# Altium PCB PCB4.PcbDoc
Units mm, origin at the board's own origin, x right, y up, seen from the top; angles counter-clockwise.
Board outline 99.95 x 84.84 mm, 2 copper layers (Top Layer, Bottom Layer); 40 components, 28 nets, 106 pads, 24 vias.
Unrouted connection lines stored in the file: 10.
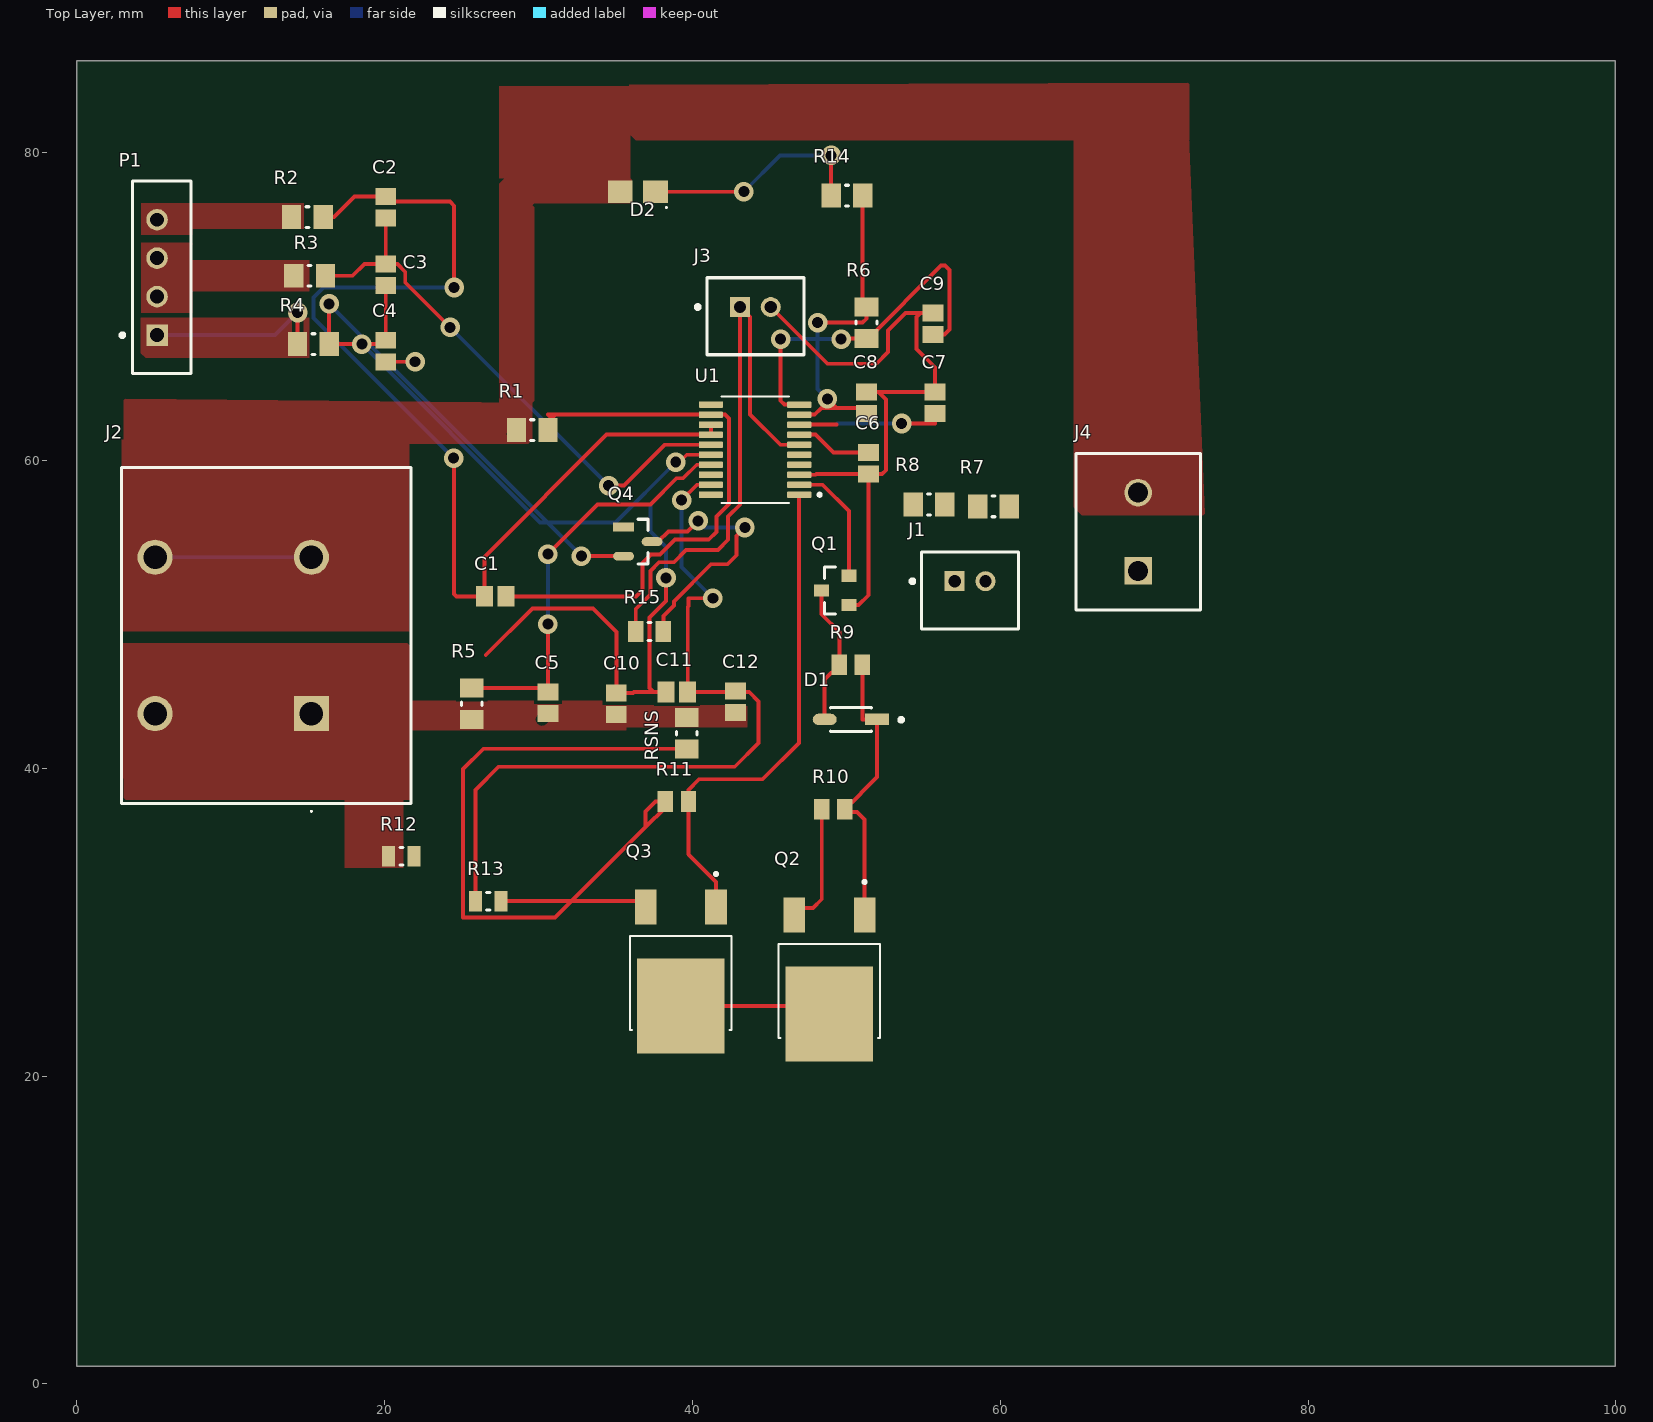
[diagram p0: Top Layer view]
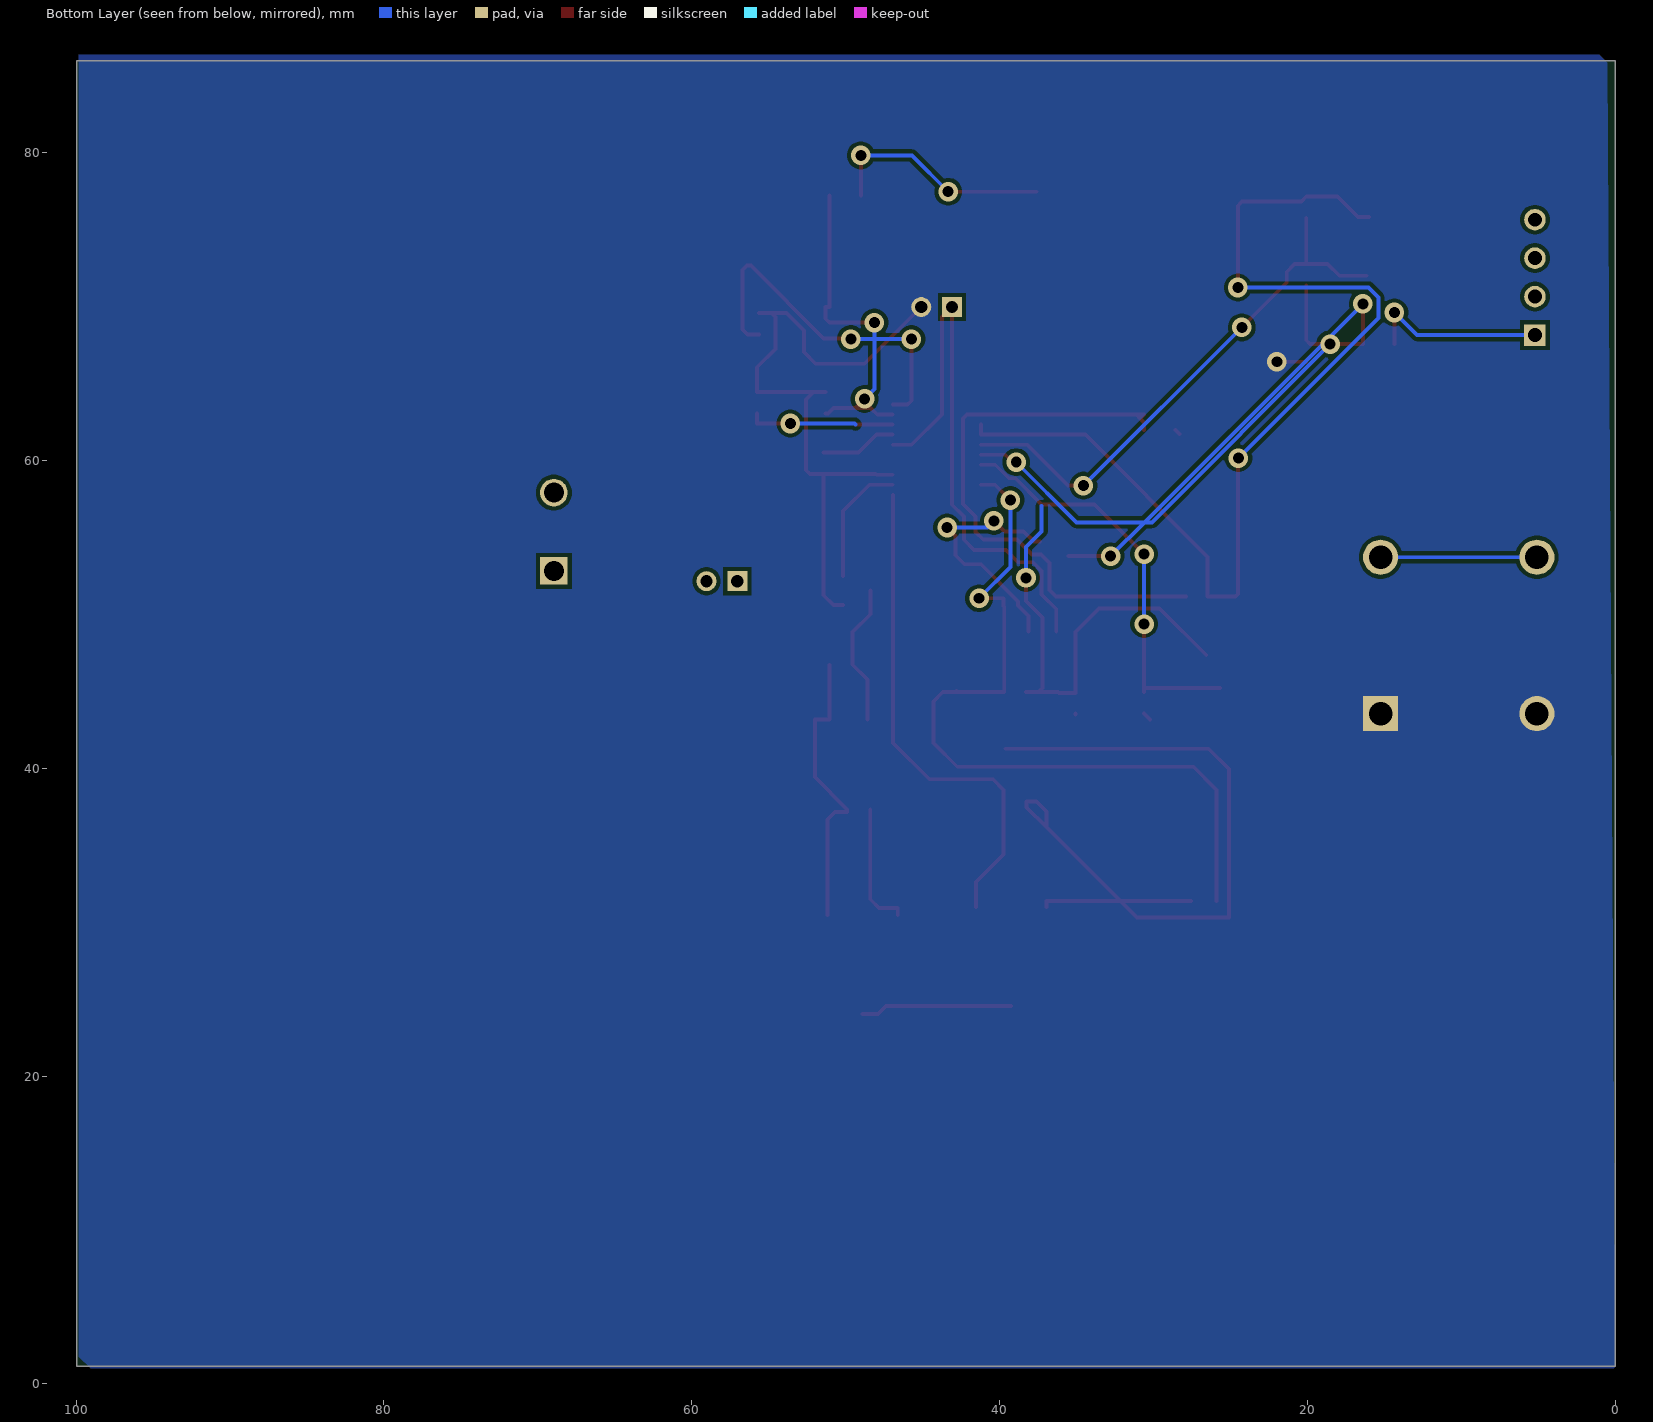
[diagram p1: Bottom Layer view, seen from below]

## Layer stack, top to bottom
Top Solder: solder mask 0.0102, Solder Resist, Dk 3.5
Top Layer: signal copper 0.0356
Dielectric 1: dielectric 0.32, FR-4, Dk 4.8
Bottom Layer: signal copper 0.0356
Bottom Solder: solder mask 0.0102, Solder Resist, Dk 3.5

## Board outline
0,1.143 99.949,1.143 99.949,85.979 0,85.979

## Design rules (kind name [scope] priority, off if disabled: settings)
Clearance [All] p1: gap=0.254 ignorepadtopadclearanceinfootprint=FALSE
PlaneConnect [All] p1: planeconnectstyle=Direct reliefexpansion=0.508 reliefentries=4 reliefconductorwidth=0.254 reliefairgap=0.254
PolygonConnect [All] p1: connectstyle=Direct reliefconductorwidth=0.2 reliefentries=4 polygonreliefangle="90 Angle" airgapwidth=0.2
RoutingVias [All] p1: holewidth=0.711 width=1.27 viastyle="Through Hole" minholewidth=0.711 minwidth=1.27 maxholewidth=0.711 maxwidth=1.27
SolderMaskExpansion [All] p1: expansion=0.102 istentingtop=FALSE
SupplyNets "Schematic Supply Nets" [InNet('GND')] p1: voltage=0.000
Width [All] p1: maxlimit=0.254 minlimit=0.254 preferedwidth=0.254
29 further rules are at their usual default settings.

## Components (designator, comment, footprint, x,y, rotation, side; value= is the part's Value field where it differs from the comment)
C1 "1uF" CAPC2013X140X50LL20T25 27.178,51.181 r0 top
C2 "1uF" CAPC2013X140X50LL20T25 20.066,76.454 r90 top
C3 "1uF" CAPC2013X140X50LL20T25 20.066,72.074 r90 top
C4 "1uF" CAPC2013X140X50LL20T25 20.066,67.118 r90 top
C5 "1uF" CAPC2013X140X50LL20T25 30.607,44.258 r270 top
C6 "1uF" CAPC2013X140X50LL20T25 51.435,59.817 r90 top
C7 "4.7uF" CAPC2013X140X50LL20T25 55.753,63.754 r270 top
C8 "1uF" CAPC2013X140X50LL20T25 51.308,63.754 r270 top
C9 "10uF" CAPC2013X140X50LL20T25 55.626,68.899 r270 top
C10 "0.1 uF" CAPC2013X140X50LL20T25 35.052,44.196 r270 top
C11 "0.1 uF" CAPC2013X140X50LL20T25 38.989,44.958 r180 top
C12 "0.1 uF" CAPC2013X140X50LL20T25 42.799,44.323 r90 top
D1 "1N5819HW" FP-SOD123-IPC_A 50.292,43.18 r180 top
D2 "SMF24A-HE3-08" DIOM2818X11N 36.449,77.47 r180 top
J1 "440054-2" FP-440054-2-MFG 58.039,51.562 r180 top
J2 "39970-0102" 399700102 15.24,43.561 r90 top
J3 "440054-2" FP-440054-2-MFG 44.085,69.377 r180 top
J4 "1729128" PHOE-1729128-2_V 68.961,55.372 r90 top
P1 "B4B-EH-A(LF)(SN)" JST-B4B-EH-A_V 5.207,71.902 r90 top
Q1 "IRLML6401TRPBF" FP-SOT23-MFG 49.276,51.562 r180 top
Q2 "TSM090N03CPROG" TRANS_TSM090N03CPROG 48.895,26.289 r270 top
Q3 "TSM090N03CPROG" TRANS_TSM090N03CPROG 39.242,26.798 r270 top
Q4 "2N7002NXAKR" FP-SOT23-IPC_B 36.449,54.737 r0 top
R1 "100" RESC2013X60X30ML20T20 29.591,61.976 r0 top
R2 "100" RESC2013X60X30ML20T20 14.977,75.819 r0 top
R3 "100" RESC2013X60X30ML20T20 15.122,72.009 r0 top
R4 "100" RESC2013X60X30ML20T20 15.367,67.564 r0 top
R5 "100" RESC2013X60X30ML20T20 25.654,44.196 r90 top
R6 "100" RESC2013X60X30ML20T20 51.308,68.961 r90 top
R7 "10K" RESC2013X60X30ML20T20 59.554,57.023 r180 top
R8 "10K" RESC2013X60X30ML20T20 55.372,57.15 r180 top
R9 "1M Ohm" RESC2013X60X40LL20T25 50.292,46.736 r180 top
R10 "ERA-6AEB105V" RESC2013X60X40LL20T25 49.149,37.338 r0 top
R11 "ERA-6AEB105V" RESC2013X60X40LL20T25 38.989,37.846 r0 top
R12 "100" RESC2013X50X30LL20T20 21.082,34.29 r0 top
R13 "100" RESC2013X50X30LL20T20 26.733,31.369 r180 top
R14 "100" RESC2013X60X30ML20T20 50.038,77.216 r180 top
R15 "10K" RESC2013X60X35NL10T20 37.211,48.895 r0 top
RSNS "5m Ohm 0805" RESC2013X60X30ML20T20 39.624,42.282 r90 top
U1 "" BQ7692006PW 44.069,60.706 r180 top

## Footprints (in the part's own frame and the unit in brackets; to place one, negate y for a bottom-side part, rotate by r counter-clockwise, add the part's x,y. Pads: shape width x height; smd on the part's side, far side on the other; paste and mask are expansions set on the pad)
399700102 [mm]
  rect 2.28x2.28 hole 1.52: 1(0,0)
  round 2.28 hole 1.52: 2(0,10.16) 3(10.16,0) 4(10.16,10.16)
  silkscreen extent -6.4,-6.47 16,12.33
BQ7692006PW [mm]
  rrect25% 1.57x0.41 smd: 1(-2.87,2.925) 2(-2.87,2.275) 3(-2.87,1.625) 4(-2.87,0.975) 5(-2.87,0.325) 6(-2.87,-0.325) 7(-2.87,-0.975) 8(-2.87,-1.625) 9(-2.87,-2.275) 10(-2.87,-2.925) 11(2.87,-2.925) 12(2.87,-2.275) 13(2.87,-1.625) 14(2.87,-0.975) 15(2.87,-0.325) 16(2.87,0.325) 17(2.87,0.975) 18(2.87,1.625) 19(2.87,2.275) 20(2.87,2.925)
  silkscreen extent -4.29,-3.45 2.2,3.45, body extent -3.2,-3.25 3.2,3.25, height 1.2
CAPC2013X140X50LL20T25 [mm] "Chip Capacitor, 2-Leads, Body 2.00x1.25mm, IPC High Density"
  rect 1.1x1.35 smd: 1(-0.7,0) 2(0.7,0)
  body extent -1.1,-0.72 1.1,0.72, height 1.4
DIOM2818X11N [mm] "Molded Diode, 2-Leads, Body 2.80x1.80mm, IPC Medium Density"
  rect 1.6x1.45 smd: 1(-1.15,0) 2(1.15,0)
  silkscreen extent -1.9,0.98 -1.8,1.07, body extent -1.67,-0.95 1.67,0.95, height 1.08
FP-440054-2-MFG [mm]
  rect 1.3x1.3 hole 0.8 paste-2539.97 mask+0: 1(1,-0.6)
  round 1.3 hole 0.8 paste-2539.97 mask+0: 2(-1,-0.6)
  silkscreen extent -3.15,-2.5 3.87,2.5, body extent -3.25,-2.6 3.25,2.6, height 0.25
FP-SOD123-IPC_A [mm]
  rect 1.557x0.742 smd paste+0 mask+0: 1(-1.7,0)
  rrect100% 1.557x0.742 smd paste+0 mask+0: 2(1.7,0)
  silkscreen extent -3.39,-0.78 1.33,0.78, body extent -2.98,-1.28 2.98,1.28, height 0.25
FP-SOT23-IPC_B [mm]
  rect 1.355x0.562 smd paste+0 mask+0: 1(-0.925,0.95)
  rrect100% 1.355x0.562 smd paste+0 mask+0: 2(-0.925,-0.95) 3(0.925,0)
  silkscreen extent 0,-1.45 0.65,1.45, body extent -1.85,-1.7 1.85,1.7, height 0.25
FP-SOT23-MFG [mm]
  rect 0.972x0.802 smd paste+0 mask+0: 1(-0.885,0.95) 2(-0.885,-0.95) 3(0.885,0)
  silkscreen extent -0.02,-1.52 0.7,1.52, body extent -1.47,-1.62 1.47,1.62, height 0.25
JST-B4B-EH-A_V [mm] "Header, 4-Leads, Body 12.5x3.8mm, Pitch 2.5mm"
  rect 1.4x1.4 hole 0.9: 1(-3.75,0)
  round 1.4 hole 0.9: 2(-1.25,0) 3(1.25,0) 4(3.75,0)
  silkscreen extent -6.25,-2.2 6.25,2.37, body extent -6.25,-2.2 6.25,1.6, height 6
PHOE-1729128-2_V [mm] "Receptacle, 2-Leads, Body 8.1x10.16mm, Pitch 5.08mm"
  rect 1.8x1.8 hole 1.3: 1(-2.54,0)
  round 1.8 hole 1.3: 2(2.54,0)
  silkscreen extent -5.08,-4.05 5.08,4.05, body extent -5.65,-4.05 5.08,4.05, height 10.01
RESC2013X50X30LL20T20 [mm] "Chip Resistor, 2-Leads, Body 2.00x1.25mm, IPC High Density"
  rect 0.85x1.35 smd: 1(-0.825,0) 2(0.825,0)
  silkscreen extent -0.1,-0.58 0.1,0.58, body extent -1.1,-0.72 1.1,0.72, height 0.5
RESC2013X60X30ML20T20 [mm] "Chip Resistor, 2-Leads, Body 2.00x1.25mm, IPC Low Density"
  rect 1.25x1.55 smd: 1(-1.025,0) 2(1.025,0)
  silkscreen extent -0.1,-0.67 0.1,0.67, body extent -1.1,-0.72 1.1,0.72, height 0.6
RESC2013X60X35NL10T20 [mm] "Chip Resistor, 2-Leads, Body 2.1x1.35mm, IPC Medium Density"
  rect 1x1.35 smd: 1(-0.9,0) 2(0.9,0)
  silkscreen extent -0.1,-0.58 0.1,0.58, body extent -1.05,-0.68 1.05,0.67, height 0.6
RESC2013X60X40LL20T25 [mm] "Chip Resistor, 2-Leads, Body 2.00x1.25mm, IPC High Density"
  rect 1x1.35 smd: 1(-0.75,0) 2(0.75,0)
  body extent -1.1,-0.72 1.1,0.72, height 0.6
TRANS_TSM090N03CPROG [mm]
  rect 2.29x1.4 smd: 1(-4.19,2.285) 3(-4.19,-2.285)
  rect 6.18x5.69 smd paste-4: 2(2.245,0)
  silkscreen extent -6.43,-3.3 3.8,3.3, body extent -5.05,-3.3 5.05,3.3, height 2.3

## Part data
C1 C2 C3 C4 C5 C6 C7 C8 C9 C10 C11 C12: library part CMP-2007-03234-1, Manufacturer=Kemet, Part Number=C0805C105K3RACTU
D1: library part CMP-0303-00003-3, "DIODE SCHOTTKY 40V 1A SOD123", Average Rectified Current=1A, Capacitance=110pF, Case/Package=SOD-123-2, Forward Voltage=450mV, Max Forward Surge Current (Ifsm)=25A, Max Operating Temperature=125°C, Max Power Dissipation=450mW, Max Repetitive Reverse Voltage (Vrrm)=40V, Min Operating Temperature=-65°C, Package Quantity=3000, Peak Reverse Current=50uA, Contact Plating=Tin, Current Rating=1A, Element Configuration=Single, Forward Current=1A, Height=1.25mm, Lead Free="Lead Free", Length=2.85mm, Max Reverse Voltage (DC)=40V, Number of Pins=2, Output Current=1A, Packaging="Tape and Reel", Peak Non-Repetitive Surge Current=25A, Polarity=Standard, Radiation Hardening=No, REACH SVHC="No SVHC", Termination=SMD/SMT, Voltage Rating (DC)=40V, Weight=0.000353oz, Width=1.7mm
D2: library part CMP-004-00031-1, "Trans Voltage Suppressor Diode, 1000W, 24V V(RWM), Unidirectional, 1 Element, Silicon, DO-219AB", Max Operating Temperature=150°C, Min Operating Temperature=-55°C, Pins=2, RoHS Compliant=Yes
J1 J3: library part CMP-03369-000005-1, "CONN HEADER VERT 2POS 2MM", Current Rating=3A, Manufacturer="TE Connectivity", Temperature="-25°C to +85°C", Temperature Range High=+85°C, Temperature Range Low=-25°C, Voltage Rating=250V, Automotive=No, Category=Conn, ComponentLink2Description=Datasheet, ComponentLink2URL=https://www.te.com/usa-en/product-440054-2.datasheet.pdf, Conn Gender=Male, Conn Orientation=Vertical, Contact Material=Tin,Nickel, Device Class L1=Connectors, Device Class L2="Headers and Wire Housings", Device Class L3=unset, Digikey Description="CONN HEADER VERT 2POS 2MM", Footprint Url=https://www.te.com/commerce/DocumentDelivery/DDEController?Action=showdoc&DocId=Customer+Drawing%7F440054%7FF6%7Fpdf%7FEnglish%7FENG_CD_440054_F6.pdf%7F440054-2, Height=6.35mm, Lead Free=Yes, Manufacturer Part Number=440054-2, Mouser Description="Headers & Wire Housings 2.0mm HDR 2pos VERT HPI", Number Of Contacts=2, Number Of Rows=1, Octopart=https://octopart.com/440054-2-te+connectivity-40237927, Package=440054-2, Pitch=2mm, RoHS=TRUE
J2: "10.16mm Beau Eurostyle Fixed Mount PCB Terminal Block, High Power 40A,  Circuits", Manufacturer_Name=Molex, Mouser Part Number=538-39970-0102, Datasheet Link=https://www.molex.com/pdm_docs/sd/399700102_sd.pdf, Geometry.Height=30mm, Manufacturer_Part_Number=39970-0102, Mouser Price/Stock=https://www.mouser.co.uk/ProductDetail/Molex/39970-0102?qs=E1QQzziZK0%252BNAsw%2FMf08Pw%3D%3D
J4: library part CMP-2000-05815-1, "PCB Terminal Block, 13.5 A, 400 V, 2-Pin THD, RoHS, Bulk", Current Rating=13500mA, Manufacturer="Phoenix Contact", Package Description="2-Pin Through Hole Device, Body 8.1 x 10.16 mm, Pitch 5.08 mm", Package Reference=1729128-2, Package Version=03/2015, Voltage Rating=400V, Datasheet URL=https://datasheet.ciiva.com/16046/1729128-16046181.pdf, Datasheet Version=12/2013, Manufacturer URL=http://www.phoenixcontact.com/, Mounting Technology=ThroughHole, No. of Positions=2, No. of Rows=1, Orientation=Horizontal, Package URL=https://www.phoenixcontact.com/online/portal/pi/pxc/product_detail_page/!ut/p/b1/3VdJjqNKFDxLH8AFycySyWY2ozFsEPOMMQaDOX1XedGL_1Vdm5YXJleknhSKeBkvI6EA8ncAo3AYoDhBQGco6KN7VURTdemj9us_IEKEZo_YHiPAEWEFmDGOHMORkqKYCORBZxgL7ZoaZYcbFFUZ3fqxSY6GOuxydWUuHqz1ynmMFygu583Bob0Ewr6Sd_l-5m-kAueHiB0jpRwZwe58wwtkpxtMYd_LmGcDRU02dRNEyWt6Y2ti5pSyJ_reIkzIulrqApdnbT11V5jnCKbYNCvhEM1MCpPByat_X379-iThf08CI5GfOPqfBeS3BRoBOdD55AKVv0iLwCMq-2BrzXWSGRH7pUGD9uwXQjiph3xL0DKQwdGa0JImiIOmBNOestqgwTHSSs2oOep-78apyXQBvNi8ZLaFjvjWvcaUEBu0MC6Wbe-d6mB0FAebo2lUWinqYaZs5DAYzV0RP9yitUjnGJ0iI9xhZkT42OCQNUJJhkgWINNQLP2JFP6OpMg3JCVg70jqHT0lvKOnhHf0lPuOnnLf0VPuWx6_dxwUIvwk5WMkT0kLL1mh61l2yZVSzG3pYV_bqo-mj6uMKwKwdnnW8Jh5RTOJzMOA5c-eJDaZQw4mTMPH02PvS_ZAqNVjVTo2WyYLkwH_KU1mmmG5kjRhDqPXLwwVHvVOjCM60-fpXvTDfMGW1PVFVS1r4e4yVDk4ZdNbkUHvqPqQSeian4UD39fNKmachqdJ1NJbyk8rXT9mXTvPk3oE5meulKGgiruPJek-4I9hTT6G8ZLOyRSm2RRVbThERQad5OS28hdt4YW4vG0stgYYzsWsK4_7y6DZMjJSCqri1kyiZR5vD7pwIrNR7QwPHTcLTI5qT7eRlpHrdGiupYlqQDJ7zy_CND8fWWBoLRXxk1RVcXiBQwbTD4Xi7KL-FuO94t9xaqweXzH, Packing=Bulk, PartNumber=1729128, Pitch=5.08mm, RoHS=TRUE
P1: library part CMP-2000-05904-1, "Male Header, Pitch 2.5 mm, 1 x 4 Position, Height 6 mm, Tail Length 3.2 mm, -25 to 85 degC, RoHS, Bulk", Manufacturer=JST, Package Description="Male Header, Pitch 2.5 mm, 1 x 4 Position, Height 6 mm, Tail Length 3.2 mm", Package Reference=B4B-EH-A, Datasheet URL=http://www.jst-mfg.com/product/pdf/eng/eEH.pdf, Datasheet Version=12/2012, Manufacturer URL=http://www.jst.com/home2.html, Mounting Technology=SurfaceMount, No of Positions=4, Pitch=2.5mm, Style/Orientation=StraightHeader/Plug, Termination=Crimp, Type=ShroudedHeader
Q1: library part CMP-32901-000098-1, "MOSFET P-CH 12V 4.3A SOT-23", Continuous Drain Current=-4.3A, Drain To Source Breakdown Voltage=-12V, Drain To Source Resistance=0.05Ω, Gate To Source Voltage=8V, Input Capacitace At Vds="830pF @ -10V", Manufacturer=Infineon, Max Forward Diode Voltage=-1.2V, Max Junction Temp=+150°C, Package=SOT23, Power Dissipation=1.3W, Pulse Drain Current=-34A, Temperature="-55°C to +150°C", Temperature Range Low=-55°C, Automotive=No, Category=Trans, ComponentLink2Description=Datasheet, ComponentLink2URL=https://www.infineon.com/dgdl/irlml6401pbf.pdf?fileId=5546d462533600a401535668b96d2634, Depletion Mode=False, Device Class L1="Discrete Semiconductors", Device Class L2=Transistors, Device Class L3=MOSFETs, Digikey Description="MOSFET P-CH 12V 4.3A SOT-23", Drain To Source Voltage=-12V, Gate Charge At Vgs="10nC @ -5V", Height=1.12mm, Ipc Land Pattern Name=SOT95P237X100-3, Lead Free=Yes, Manufacturer Part Number=IRLML6401TRPBF, Number Of Channels=1, Number Of P Channels=1, Octopart=https://octopart.com/irlml6401trpbf-infineon-65874987, Reverse Recovery Charge=8nC, Reverse Recovery Time=22ns, RoHS=TRUE, Rthja Max=75°C/W, Standoff Height=0.01mm, Temperature Range High=+150°C, Threshold Vgs Max=-0.95V, Threshold Vgs Min=-0.4V, Turn Off Delay Time=250ns, Turn On Delay Time=11ns
Q2 Q3: library part CMP-013-00034-1, "N-Channel 30 V 50A (Tc) 40W (Tc) Surface Mount TO-252 (DPAK)", Case/Package="TO-252-3 Taiwan Semiconductor", Check_prices=https://www.snapeda.com/parts/TSM090N03CPROG/taiwan/view-part/?ref=eda, Component Type=Standard, Design Item ID=TSM090N03CPROG, MF="Taiwan Semiconductor", MP=TSM090N03CPROG, Pins=3, SnapEDA_Link=https://www.snapeda.com/parts/TSM090N03CPROG/taiwan/view-part/?ref=snap, Source=TSM090N03CPROG.SchLib
Q4: library part CMP-14409-000026-2, "2N7002NXAK/SOT23/TO-236AB"
R1 R2 R3 R4 R5 R6 R7 R8 R14 RSNS: library part CMP-2001-01991-1, Manufacturer="KOA Speer", Part Number=RK73H2ATTD1000F
R9: library part CMP-2001-00584-1, Manufacturer=Panasonic, Part Number=ERA-6AEB105V
R10 R11: library part CMP-2001-00584-1, Manufacturer=Panasonic, Part Number=ERA-6AEB105V
R12 R13: library part CMP-2001-04901-1, Manufacturer="Vishay Dale", Part Number=CRCW0805100RFKEA
R15: library part CMP-1659-00013-4, "Chip Resistor, 10 KOhm, +/- 1%, 0.125 W, -55 to 155 degC, 0805 (2012 Metric), RoHS, Tape and Reel", Manufacturer=Yageo, Max Operating Temperature="155 degC", Min Operating Temperature="-55 degC", Package Quantity=5000, Voltage Rating="150 V", ComponentLink1Description="Manufacturer URL", ComponentLink1URL=http://www.yageo.com/, ComponentLink2Description=Datasheet, ComponentLink2URL=http://www.yageo.com/documents/recent/PYu-RC_Group_51_RoHS_L_04.pdf, DatasheetVersion="Rev. 4, 02/2016", Height="0.5 mm", Length="2 mm", Mount="Surface Mount", Mounting Technology="Surface Mount", PackageDescription="2-Pin Surface Mounted Device, Body 2 x 1.25 mm", PackageReference=0805, Packaging="Tape and Reel", Pins=2, REACH SVHC="No SVHC", RoHSCompliant=true
U1: library part CMP-031-00007-1, "3 to 5-Series Cell Li-Ion and Li-Phosphate Battery Monitor (bq76940 Family)", Case/Package="TSSOP-20 Texas Instruments", Check_prices=https://www.snapeda.com/parts/BQ7692006PW/Texas+Instruments/view-part/?ref=eda, Component Type=Standard, Design Item ID=BQ7692006PW, MF="Texas Instruments", MP=BQ7692006PW, Pins=20, SnapEDA_Link=https://www.snapeda.com/parts/BQ7692006PW/Texas+Instruments/view-part/?ref=snap, Source=BQ7692006PW.SchLib

## Via types
v1: diameter 1.27, hole 0.711, Top Layer to Bottom Layer, 24 vias

## Nets (pads, with @x,y where several pads share a name; then routed paths per layer and width w, separated by ;. In a path a pad name is that pad's centre, name@x,y a point inside that pad or via, vN(x,y) a via of type N, cw(c..) or ccw(c..) an arc to the next point about the centre after c; other vN are vias at no path point)
BAT+: D2.2 J2.3 J2.4 J4.2 R1.1 | length 10.5
  Top Layer w0.254: R1.1@28.312,61.722 R1.1
  Bottom Layer w0.254: J2.4 J2.3
BAT-: J4.1 Q2.3 R10.1 | length 8.3
  Top Layer w0.254: Q2.3 46.61,30.937 47.84,30.937 48.399,31.496 R10.1
CHG_FET: D1.1 Q2.1 R9.1 R10.2 | length 19.1
  Top Layer w0.254: R9.1 51.042,43.18 D1.1 51.994,43.18 51.994,39.433 R10.2 49.899,37.16 50.697,37.16 51.18,36.678 Q2.1
CHG_PIN: Q1.2 U1.2 | length 8.1
  Top Layer w0.254: U1.2 48.448,58.431 50.161,56.718 Q1.2
DSG_PIN: Q3.1 R11.2 U1.1 | length 32.9
  Top Layer w0.254: Q3.1 41.527,32.629 39.739,34.417 R11.2 39.739,38.608 40.425,39.294 44.552,39.294 46.914,41.656 46.914,57.781 U1.1
GND: C4.1 C5.2 C6.1 C7.1 C8.1 C9.1 C10.2 C12.1 J2.1 J2.2 J3.2 Q1.1 R5.1 R12.1 RSNS.2 U1.3 | length 48.2
  Top Layer w0.254: C4.1 20.069,66.421 v1(21.971,66.421) ; C5.2@30.22,43.171 C5.2 ; C10.2 C10.2@35.052,43.558 ; J3.2 48.768,66.294 51.943,66.294 52.705,67.056 52.705,68.456 53.848,69.599 54.816,69.599 ; U1.3 48.006,59.081 48.042,59.117 C6.1 ; Q1.1 50.8,50.612 51.435,51.247 C6.1 ; C9.1 54.816,69.599 ; C7.1 C7.1@55.753,64.465 ; C6.1 52.324,59.117 52.578,59.371 52.578,63.957 52.081,64.454 C8.1 51.308,64.465 C7.1@55.753,64.465 ; 54.816,69.599 54.559,69.342 54.559,67.259 55.753,66.065 C7.1@55.753,64.465
NetC1_1: C1.1 C2.2 R2.2 U1.13 U1.14 | length 70.3
  Top Layer w0.254: R2.2 16.699,75.819 18.034,77.154 C2.2 20.385,76.835 24.235,76.835 24.511,76.559 v1(24.511,71.247) ; v1(24.478,60.165) 24.511,60.133 24.511,51.33 24.66,51.181 C1.1 26.478,53.742 34.417,61.681 U1.14 U1.13
  Bottom Layer w0.254: v1(24.478,60.165) 15.376,69.268 15.376,70.601 16.022,71.247 v1(24.511,71.247)
NetC1_2: C1.2 R1.2 U1.12 | length 47.7
  Top Layer w0.254: C1.2 36.338,51.181 36.754,51.597 36.754,53.34 37.313,53.899 37.89,53.899 38.851,54.86 41.058,54.86 41.57,55.372 41.57,56.379 42.367,57.175 42.367,62.738 42.113,62.992 31.124,62.992 31.113,62.981 ; R1.2 30.616,62.484 R1.2@30.865,62.733 ; U1.12 31.113,62.981 ; R1.2@30.865,62.733 31.113,62.981 ; R1.2@30.865,62.733 30.616,62.981 31.113,62.981
NetC2_1: C2.1 C3.2 R3.2 U1.15 | length 35.8
  Top Layer w0.254: R3.2 17.911,72.009 18.676,72.774 C3.2 ; C2.1 C3.2 ; v1(24.257,68.656) 21.336,71.577 21.336,72.266 20.828,72.774 C3.2 ; v1(34.544,58.369) 35.56,58.369 38.222,61.031 U1.15
  Bottom Layer w0.254: v1(24.257,68.656) v1(34.544,58.369)
NetC3_1: C3.1 C4.2 Q4.2 R4.2 U1.16 | length 65.2
  Top Layer w0.254: v1(16.392,70.18) R4.2 v1(18.517,67.564) 19.812,67.564 C4.2 C3.1 ; v1(32.785,53.787) Q4.2 ; v1(38.913,59.893) 39.136,59.893 39.624,60.381 U1.16
  Bottom Layer w0.254: v1(16.392,70.18) 30.591,55.982 ; v1(18.517,67.564) 30.099,55.982 30.591,55.982 ; v1(32.785,53.787) 30.591,55.982 ; v1(38.913,59.893) 35.001,55.982 30.591,55.982
NetC5_1: C5.1 R5.2 U1.17 | length 26.9
  Top Layer w0.254: R5.2 C5.1@30.607,45.221 ; C5.1 C5.1@30.607,45.221 ; v1(30.607,49.378) C5.1@30.607,45.221 ; v1(30.607,53.924) 33.833,57.15 37.262,57.15 38.964,58.852 39.395,58.852 40.275,59.731 U1.17
  Bottom Layer w0.254: v1(30.607,49.378) v1(30.607,53.924)
NetC6_2: C6.2 U1.7 | length 5
  Top Layer w0.254: U1.7 48.006,61.681 49.17,60.517 C6.2
NetC7_2: C7.2 R7.2 R8.2 U1.8 | length 9.5
  Top Layer w0.254: U1.8 49.352,62.331 ; v1(53.594,62.408) 55.753,62.408 C7.2
  Bottom Layer w0.254: 49.352,62.331 49.429,62.408 v1(53.594,62.408)
NetC8_2: C8.2 R6.2 R14.1 U1.9 | length 22.3
  Top Layer w0.254: U1.9 47.944,62.981 48.387,63.424 49.352,63.424 ; v1(48.133,68.961) 51.054,68.961 51.308,69.215 R6.2 51.054,69.986 51.054,77.216 R14.1 ; v1(48.768,64.008) 49.352,63.424 ; C8.2 51.144,63.054 50.775,63.424 49.352,63.424
  Bottom Layer w0.254: v1(48.133,68.961) 48.133,64.643 v1(48.768,64.008)
NetC9_2: C9.2 R6.1 U1.10 | length 23.5
  Top Layer w0.254: v1(45.72,67.894) 45.72,63.885 45.974,63.631 U1.10 ; v1(49.657,67.894) 49.699,67.936 R6.1 51.426,67.936 56.159,72.669 56.413,72.669 56.693,72.39 56.693,68.504 56.388,68.199 C9.2
  Bottom Layer w0.254: v1(45.72,67.894) v1(49.657,67.894)
NetC10_1: C10.1 C11.2 R12.2 U1.18 | length 30.7
  Top Layer w0.254: 26.568,47.371 29.591,50.394 33.528,50.394 35.052,48.87 C10.1 36.133,44.896 36.195,44.958 37.465,44.958 ; v1(38.278,52.375) 38.278,50.864 37.211,49.797 37.211,45.212 37.465,44.958 ; C11.2 37.465,44.958
  Bottom Layer w0.254: 37.262,57.048 37.262,55.397 38.278,54.381 v1(38.278,52.375)
NetC11_1: C11.1 C12.2 R13.2 U1.19 | length 51.7
  Top Layer w0.254: R13.2 25.908,38.608 27.407,40.107 42.748,40.107 44.298,41.656 44.298,44.348 43.688,44.958 C12.2@42.799,44.958 ; v1(39.294,57.429) 40.295,58.431 U1.19 ; v1(41.326,51.054) 39.742,51.054 39.742,50.533 39.689,50.48 C11.1 C12.2@42.799,44.958 ; C12.2 C12.2@42.799,44.958
  Bottom Layer w0.254: v1(39.294,57.429) 39.294,53.086 v1(41.326,51.054)
NetD1_2: D1.2 Q1.3 R9.2 | length 9.3
  Top Layer w0.254: Q1.3 48.391,50.013 49.542,48.862 R9.2 48.59,45.784 48.59,43.18 D1.2
NetD2_1: D2.1 R14.2 | length 15
  Top Layer w0.254: D2.1 v1(43.332,77.47) ; R14.2 v1(49.013,79.832)
  Bottom Layer w0.254: v1(43.332,77.47) 45.695,79.832 v1(49.013,79.832)
NetJ3_1: J3.1 R15.1 U1.6 | length 36.9
  Top Layer w0.254: R15.1 36.311,50.357 37.262,51.308 37.262,52.832 37.821,53.391 38.786,53.391 39.591,54.196 41.656,54.196 42.318,54.858 42.318,56.364 43.085,57.131 J3.1 43.739,69.323 43.739,62.992 45.7,61.031 U1.6
NetP1_1: P1.1 R4.1 | length 11.8
  Top Layer w0.254: R4.1 v1(14.342,69.621)
  Bottom Layer w0.254: P1.1 12.873,68.152 v1(14.342,69.621)
NetP1_2: P1.2 P1.3 R3.1
NetP1_4: P1.4 R2.1
NetQ2_2: Q2.2 Q3.2 | length 9.9
  Top Layer w0.254: Q3.2 39.242,24.562 47.387,24.562 47.904,24.044 Q2.2
NetQ3_3: Q3.3 R11.1 R13.1 RSNS.1 | length 53.6
  Top Layer w0.254: R13.1 32.143,31.369 ; Q3.3 36.957,31.369 32.143,31.369 ; RSNS.1@39.624,41.275 26.416,41.275 25.095,39.954 25.095,30.302 31.076,30.302 32.143,31.369 ; 32.143,31.369 36.957,36.183 ; 36.957,36.183 38.239,37.465 R11.1 37.592,37.846 36.957,37.211 36.957,36.183
NetQ4_3: Q4.3 R15.2 | length 16.3
  Top Layer w0.254: Q4.3 37.77,54.737 38.43,55.397 39.675,55.397 v1(40.361,56.083) ; R15.2 38.111,49.911 38.786,50.586 38.786,50.851 41.199,53.264 42.266,53.264 42.85,53.848 42.85,55.093 v1(43.409,55.651)
  Bottom Layer w0.254: v1(40.361,56.083) 40.792,55.651 v1(43.409,55.651)
"SCL 3.3V": J1.1 R8.1 U1.5
"SDA 3.3V": J1.2 R7.1 U1.4
pads on no net: Q4.1 U1.11 U1.20

## Polygon pours and split planes (outlines as drawn)
GND on Top Layer "GND_L01_P026" (solid, pour order 26): 35.687,44.092 43.457,44.092 43.561,44.196 43.561,42.672 35.687,42.672
GND on Top Layer "GND_L01_P021" (solid, pour order 21): 20.828,44.387 20.828,42.482 35.687,42.482 35.687,44.387
GND on Top Layer "GND_L01_P019" (solid, pour order 19): 2.921,48.133 21.463,48.133 21.717,47.879 21.717,37.973 3.175,37.973 3.048,38.1
GND on Top Layer "GND_L01_P020" (solid, pour order 20): 17.399,38.227 17.399,33.528 21.209,33.528 21.209,38.227
BAT+ on Top Layer "BAT+_L01_P014" (solid, pour order 14): 29.591,63.754 29.591,61.341 29.337,61.087 3.048,61.087 3.048,64.025
NetP1_1 on Top Layer "NETP1_1_L01_P003" (solid, pour order 3): 4.162,69.273 15.084,69.273 15.084,66.675 4.474,66.675 4.162,66.987
BAT+ on Top Layer "BAT+_L01_P010" (solid, pour order 10): 73.279,56.451 65.278,56.451 64.77,56.959 64.77,81.153 72.244,81.153
BAT+ on Top Layer "BAT+_L01_P018" (solid, pour order 18): 35.902,84.423 35.902,81.4 35.814,81.312 36.322,80.804 72.263,80.804 72.263,84.552
BAT+ on Top Layer "BAT+_L01_P017" (solid, pour order 17): 27.432,78.359 27.432,84.328 36.195,84.328 35.941,84.074 35.941,78.359
BAT+ on Top Layer "BAT+_L01_P016" (solid, pour order 16): 35.941,78.359 27.813,78.359 27.432,77.978 27.432,63.627 29.464,63.627 29.718,63.881 29.718,76.454 29.591,76.581 29.718,76.708 36.068,76.708 36.068,78.232
BAT+ on Top Layer "BAT+_L01_P012" (solid, pour order 12): 2.921,48.895 21.59,48.895 21.59,61.341 2.921,61.341
NetP1_2 on Top Layer "NETP1_2_L01_P007" (solid, pour order 7): 4.191,74.168 4.191,69.596 7.493,69.596 7.493,70.993 15.113,70.993 15.113,73.025 7.366,73.025 7.366,73.914 7.62,74.168
NetP1_4 on Top Layer "NETP1_4_L01_P008" (solid, pour order 8): 4.191,76.708 4.191,74.676 7.493,74.676 7.493,75.057 14.732,75.057 14.732,76.708
GND on Bottom Layer "GND_L02_P009" (solid, pour order 9): 0.508,85.852 1.016,86.36 99.822,86.36 99.822,1.778 99.06,1.016 0,1.016